# Altium PCB EPRTwinkie.PcbDoc
Units mm, origin at the board's own origin, x right, y up, seen from the top; angles counter-clockwise.
Board outline 28.5 x 27 mm, 4 copper layers (Component Side, Signal Layer 1, Signal Layer 2, Bottom Layer), stack 1.57 mm thick; 53 components, 71 nets, 267 pads, 188 vias.
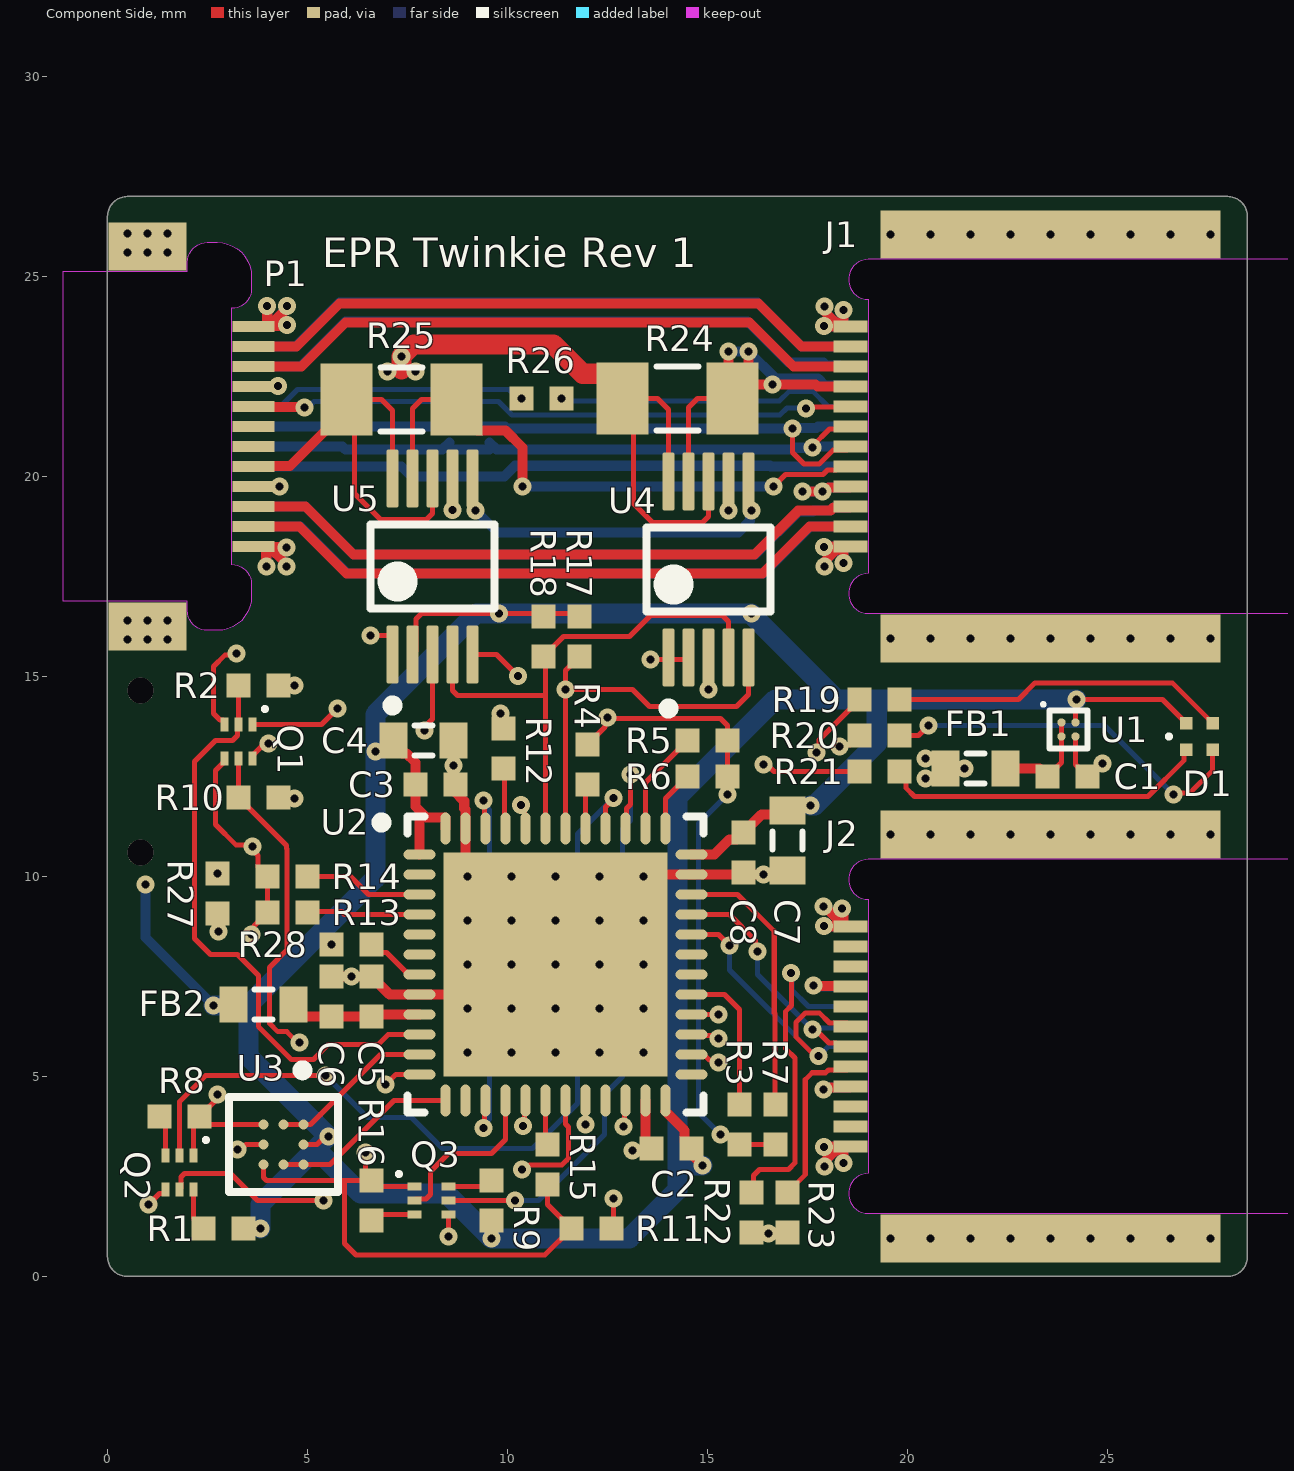
[diagram p0: Component Side view]
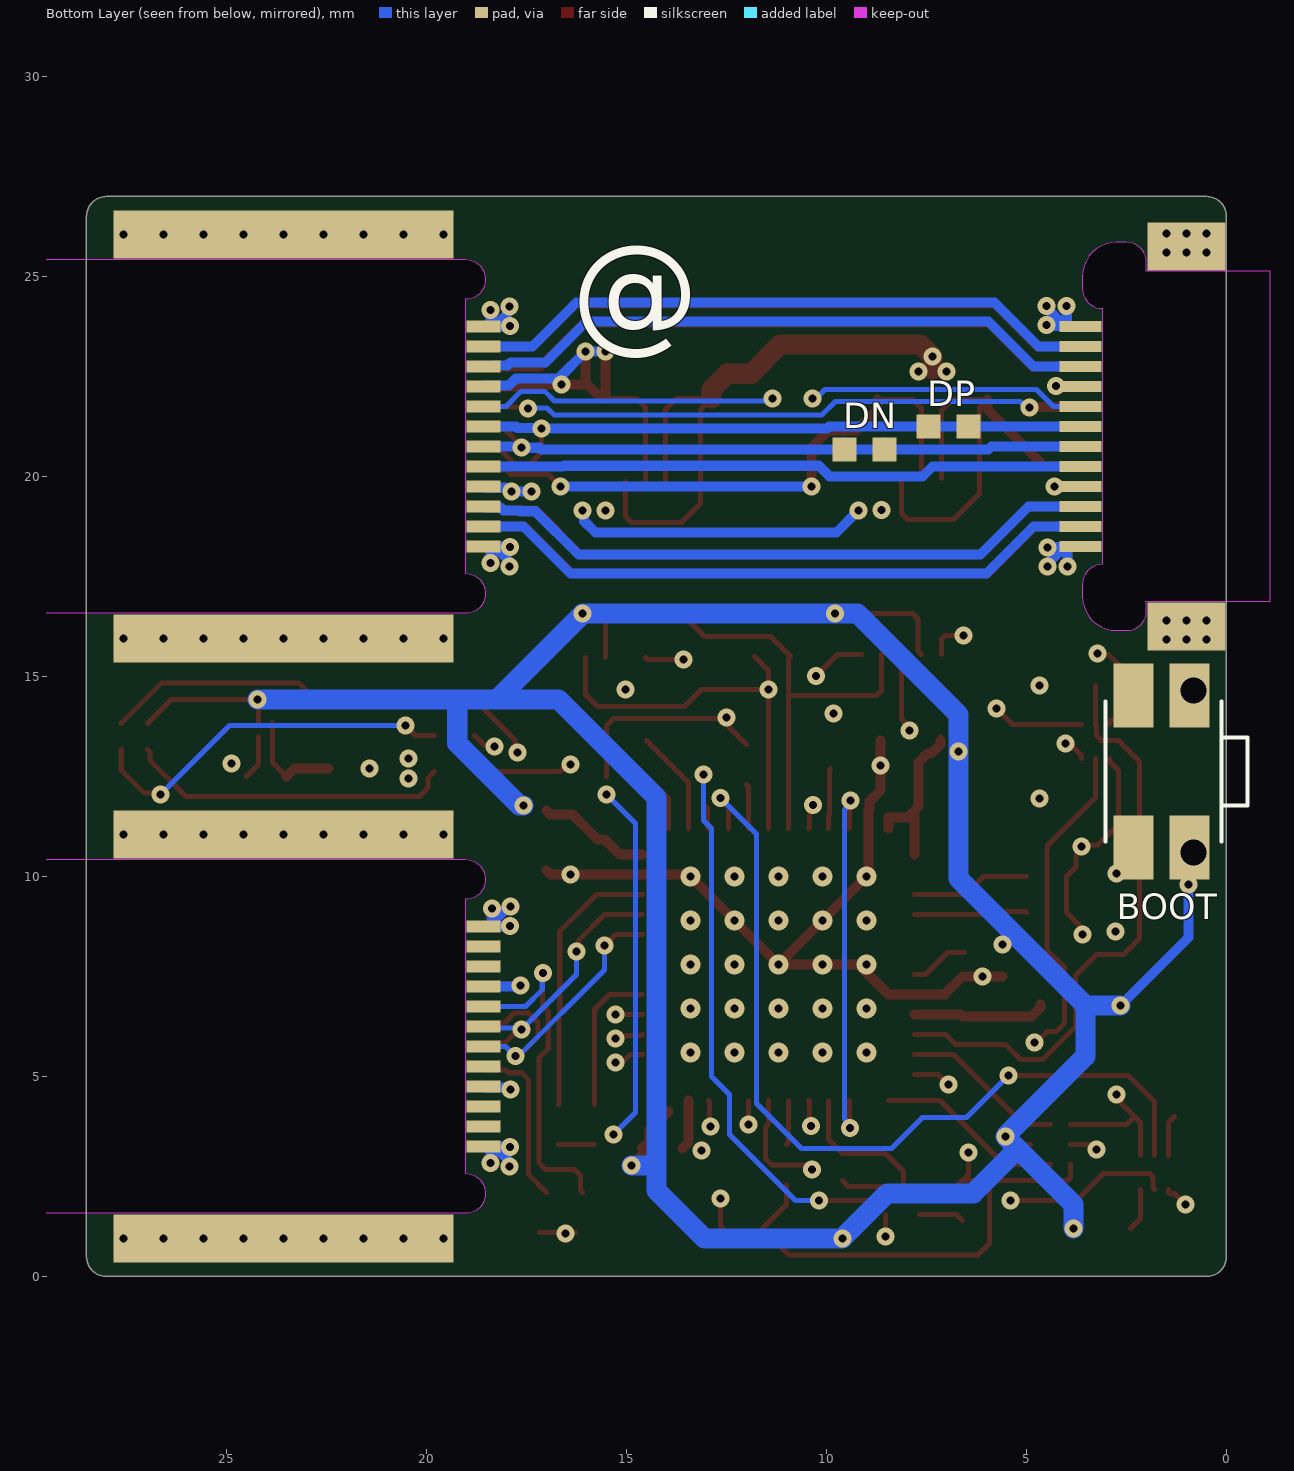
[diagram p1: Bottom Layer view, seen from below]
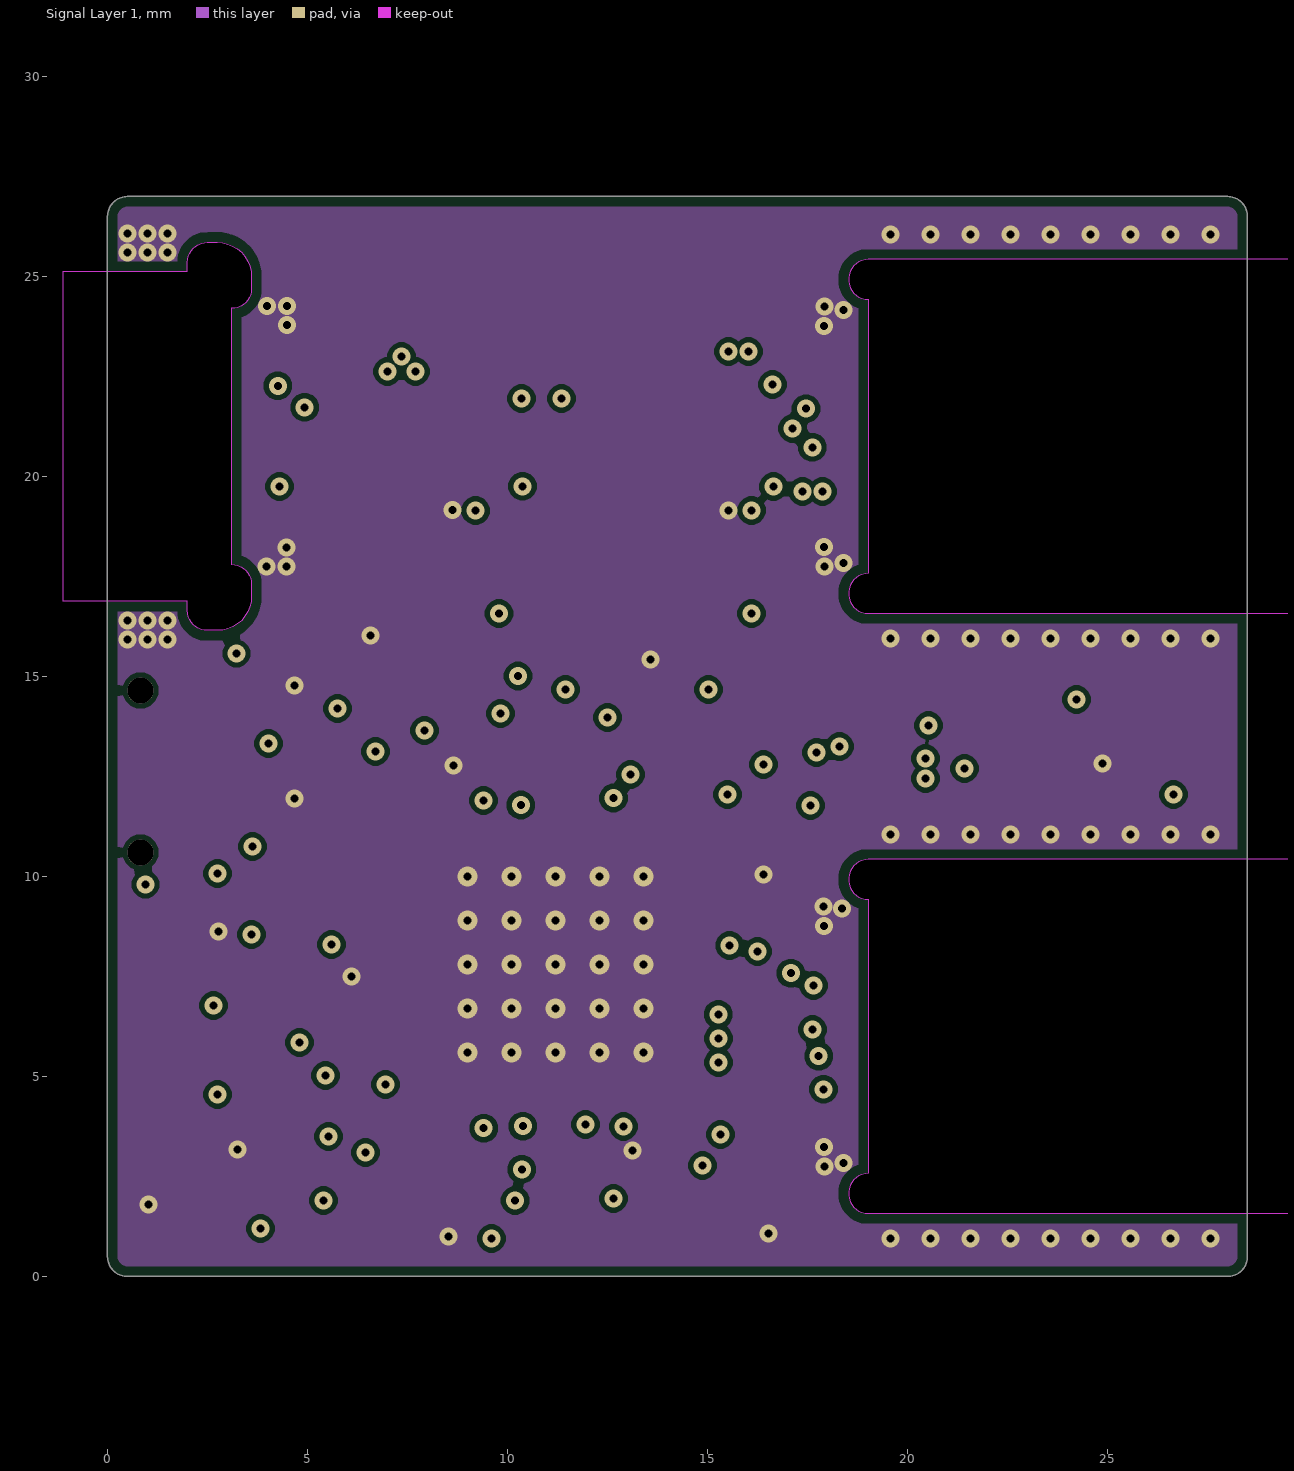
[diagram p2: Signal Layer 1]
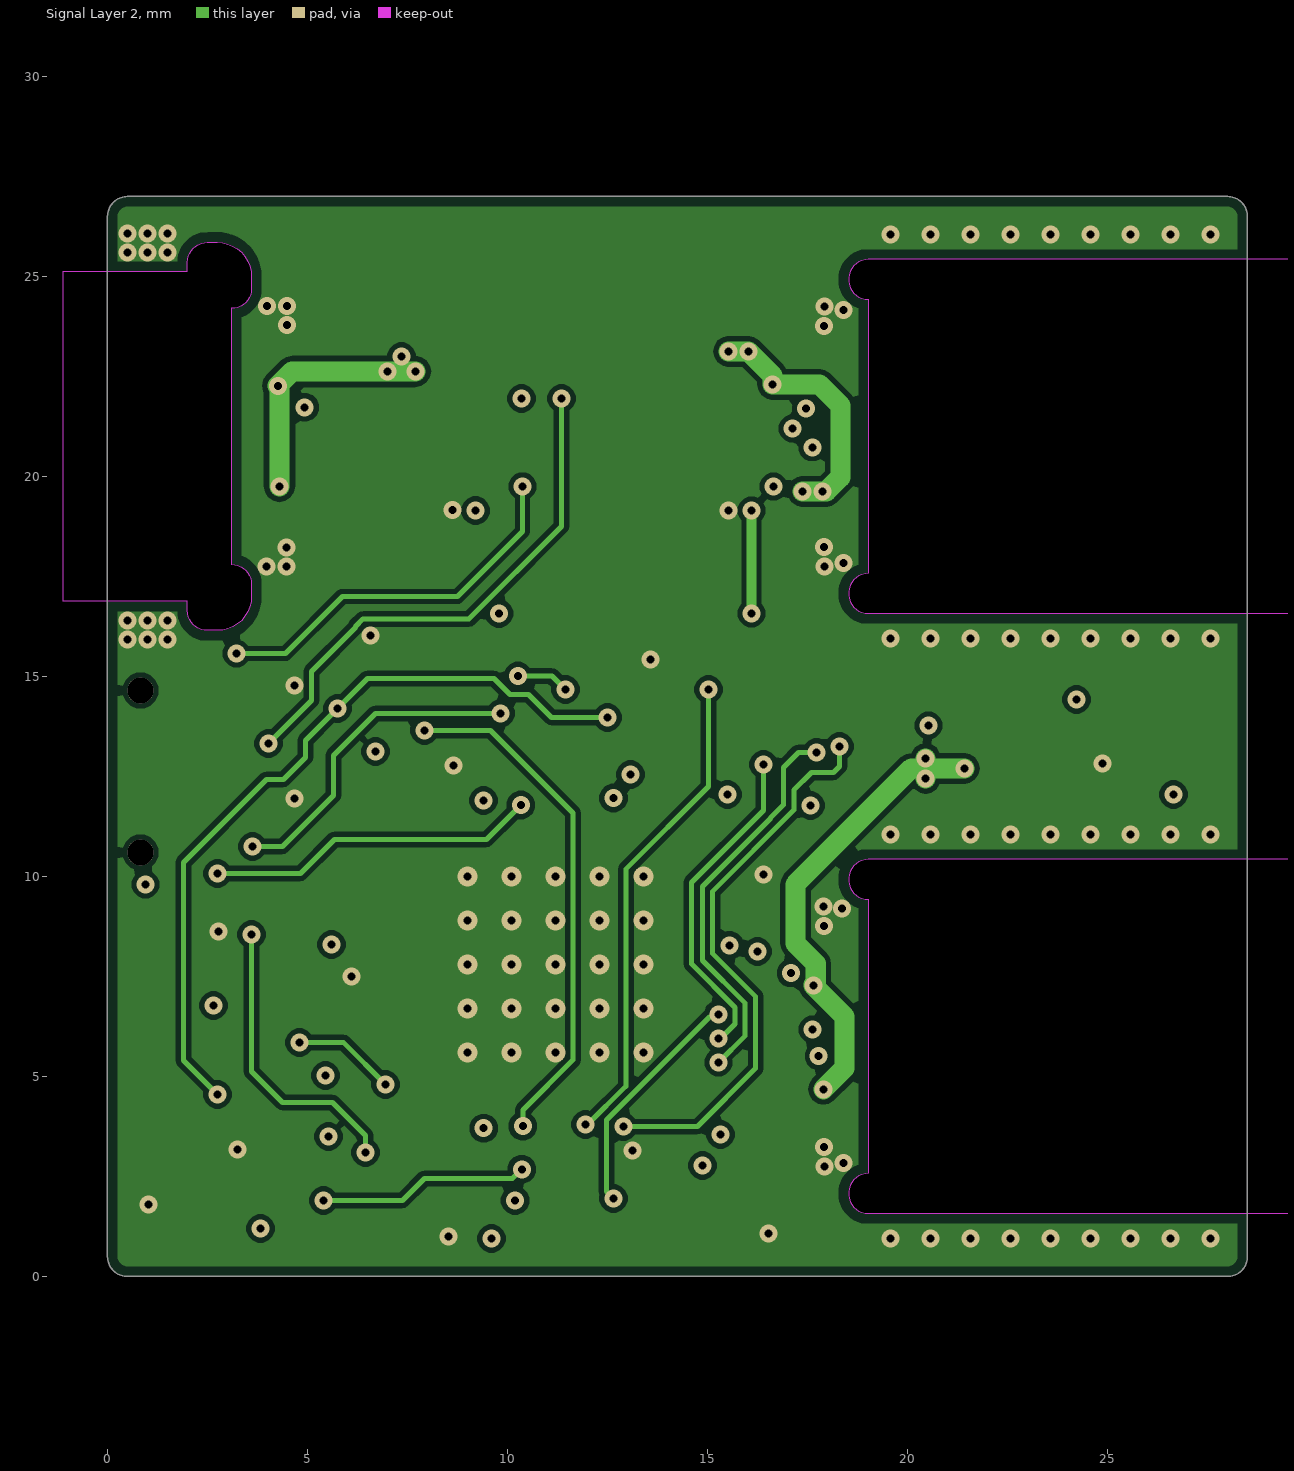
[diagram p3: Signal Layer 2]

## Layer stack, top to bottom
Top Solder: solder mask 0.0102, Solder Resist, Dk 3.8
Component Side: signal copper 0.035
Dielectric 1: prepreg 0.2, FR-4, Dk 4.6
Signal Layer 1: signal copper 0.0175
Dielectric 3: core 1.065, Dk 4.6
Signal Layer 2: signal copper 0.0175
Dielectric 2: prepreg 0.2, Dk 4.6
Bottom Layer: signal copper 0.035
Solder Side: solder mask 0.0102, Solder Resist, Dk 3.8

## Board outline
0,0.5 0,26.5 cw(c0.5,26.5) 0.5,27 28,27 cw(c28,26.5) 28.5,26.5 28.5,0.5 cw(c28,0.5) 28,0 0.5,0 cw(c0.5,0.5)

## Design rules (kind name [scope] priority, off if disabled: settings)
AssemblyTestPointUsage [All] p1: allowmultiple=TRUE
BoardOutlineClearance [All] p1: gap=0.254 ignorepadtopadclearanceinfootprint=FALSE except(0: Arc-SplitContinuation Track-SplitContinuation SMDPad-SplitContinuation THPad-SplitContinuation Via-SplitContinuation Fill-SplitContinuation Poly-SplitContinuation Region-SplitContinuation Text-SplitContinuation)
Clearance [All] p1: gap=0.127 ignorepadtopadclearanceinfootprint=FALSE
ComponentClearance [All] p1: gap=0.2 collisioncheckmode=3 verticalgap=0.254 showdistances=FALSE
FabricationTestPointUsage [All] p1: valid=0 allowmultiple=TRUE
HoleSize [All] p1: absolutevalues=TRUE maxlimit=3.1 minlimit=0.025 maxpercent=80.000 minpercent=20.000
MinimumSolderMaskSliver [All] p1: minsoldermaskwidth=0.076
PasteMaskExpansion [All] p1: expansion=-0.025
PlaneClearance [All] p1: clearance=0.254
PolygonConnect PolygonConnect_1 [HasFootprint('NETTIE_GND_LARGE')] p1: connectstyle=Direct reliefconductorwidth=0.254 reliefentries=4 polygonreliefangle="90 Angle" airgapwidth=0.254
PolygonConnect PolygonConnect_2 [InComponent('R50') or          InComponent('R58') or InComponent('R75')] p2: connectstyle=Direct reliefconductorwidth=0.254 reliefentries=4 polygonreliefangle="90 Angle" airgapwidth=0.254
PolygonConnect [All] p3: thpad.connectstyle=Relief thpad.reliefconductorwidth=0.254 thpad.reliefentries=4 thpad.polygonreliefangle="90 Angle" thpad.airgapwidth=0.254 smdpad.connectstyle=Relief smdpad.reliefconductorwidth=0.254 smdpad.reliefentries=4 smdpad.polygonreliefangle="90 Angle" smdpad.airgapwidth=0.254 via.connectstyle=Direct via.reliefconductorwidth=0.254 via.reliefentries=4 via.polygonreliefangle="90 Angle" via.airgapwidth=0.254
RoutingVias [All] p1: holewidth=0.711 width=1.27 viastyle="Through Hole" minholewidth=0.2 minwidth=0.45 maxholewidth=0.711 maxwidth=1.27
SilkToSilkClearance [All] p1: silktosilkclearance=0.025
SilkToSolderMaskClearance [IsPad] p1: minsilkscreentomaskgap=0.025 clearancetoexposedcopper=TRUE
SolderMaskExpansion [All] p1: expansion=0.019 istentingtop=FALSE
Width Width_BGA [WithinRoom('BGARoom')] p1: maxlimit=0.254 minlimit=0.09 preferedwidth=0.127
Width [All] p2: maxlimit=4 minlimit=0.127 preferedwidth=0.254 minimp=50.000000 maximp=50.000000 favimp=50.000000
21 further rules are at their usual default settings.

## Components (designator, comment, footprint, x,y, rotation, side; value= is the part's Value field where it differs from the comment)
BOOT "434331013822" 434331013822 1.575,12.625 r90 bottom
C1 "1005" CAPC1005 24,12.5 r180 top value=1u
C2 "1005" CAPC1005 14.1,3.2 r0 top value=100n
C3 "1005" CAPC1005 8.2,12.3 r180 top value=100n
C4 "1608" CAPC1608 7.9,13.4 r180 top value=4u7
C5 "1005" CAPC1005 6.6,7 r270 top value=10n
C6 "1005" CAPC1005 5.6,7 r270 top value=1u
C7 "1608" CAPC1608 17,10.9 r90 top value=4u7
C8 "1005" CAPC1005 15.9,10.6 r90 top value=100n
D1 "UHD111A" "Cree UHD111A" 27.3,13.5 r90 top
DN "1005" DogBone1005 9.05,20.675 r180 bottom net-tie
DP "1005" DogBone1005 6.95,21.25 r180 bottom net-tie
FB1 "1608" RESC1608 21.7,12.7 r180 top value=600R
FB2 "1608" RESC1608 3.9,6.8 r180 top value=600R
J1 "USB4070-30-C_REVC5" GCT_USB4070-30-C_STRADDLE 18.825,21 r270 top
J2 "USB4070-30-C_REVC5" GCT_USB4070-30-C_STRADDLE 18.825,6 r270 top
P1 "USB4151-GF-C_REVA" GCT_USB4151-GF-C_STRADDLE 3.4,21 r90 top
Q1 "PMDXB600UNE" SON35P100X40-6N 3.275,13.375 r270 top
Q2 "PMDXB600UNE" SON35P100X40-6N 1.8,2.6 r270 top
Q3 "PMDXB600UNE" SON35P100X40-6N 8.1,1.9 r0 top
R1 "1005" RESC1005 2.9,1.2 r180 top value=200R
R2 "1005" RESC1005 3.775,14.775 r0 top value=381k
R3 "1005" RESC1005 15.8,3.8 r270 top value=1k
R4 "1005" RESC1005 12,12.8 r90 top value=5k11
R5 "1005" RESC1005 15,13.4 r180 top value=4k75
R6 "1005" RESC1005 15,12.5 r180 top value=12k1
R7 "1005" RESC1005 16.7,3.8 r90 top value=35k7
R8 "1005" RESC1005 1.8,4 r180 top value=100R
R9 "1005" RESC1005 9.6,1.9 r90 top value=200R
R10 "1005" RESC1005 3.775,11.975 r0 top value=381k
R11 "1005" RESC1005 12.1,1.2 r180 top value=1k
R12 "1005" RESC1005 9.9,13.2 r90 top value=5k11
R13 "1005" RESC1005 4.5,9.1 r0 top value=4k75
R14 "1005" RESC1005 4.5,10 r0 top value=12k1
R15 "1005" RESC1005 11,2.8 r90 top value=35k7
R16 "1005" RESC1005 6.6,1.9 r270 top value=100R
R17 "1005" RESC1005 11.8,16 r270 top value=2k2
R18 "1005" RESC1005 10.9,16 r90 top value=2k2
R19 "1005" RESC1005 19.3,14.425 r180 top value=806R
R20 "1005" RESC1005 19.3,13.525 r180 top value=604R
R21 "1005" RESC1005 19.3,12.625 r180 top value=576R
R22 "1005" RESC1005 16.1,1.6 r270 top value=5k11
R23 "1005" RESC1005 17,1.6 r270 top value=5k11
R24 "3216" RESC3216 14.25,21.95 r0 top value=30m
R25 "3216" RESC3216 7.35,21.925 r0 top value=30m
R26 "1005" RESC1005 10.85,21.95 r0 top value=0R
R27 "1005" RESC1005 2.75,9.575 r270 top value=100k
R28 "1005" RESC1005 6.1,8.3 r0 top value=NM
U1 "NCP167BFCT330T2G" BGA4C35P2X2_64X64X33 24.025,13.675 r0 top
U2 "STM32F072CBU6" STM-UFQFPN48_L 11.2,7.8 r0 top
U3 "AD8606ACBZ-REEL7" FP-CB-8-1-MFG 4.4,3.3 r270 top
U4 "INA237AIDGSR" FP-DGS0010A-MFG 15.025,17.675 r90 top
U5 "INA237AIDGSR" FP-DGS0010A-MFG 8.125,17.75 r90 top

## Footprints (in the part's own frame and the unit in brackets; to place one, negate y for a bottom-side part, rotate by r counter-clockwise, add the part's x,y. Pads: shape width x height; smd on the part's side, far side on the other; paste and mask are expansions set on the pad)
434331013822 [mm] "WS-TASU 3.5x2.9 mm SMD side push"
  rect 1.6x1 smd: A1(-1.9,0.75) A2(1.9,0.75) B1(-1.9,-0.65) B2(1.9,-0.65)
  round 0.65 hole 0.65: B1(-2.025,-0.75) B2(2.025,-0.75)
  silkscreen extent -1.75,-2.1 1.75,1.45, body extent -2.35,-2.1 2.35,1.45, height 1.35
BGA4C35P2X2_64X64X33 [mm]
  round 0.208 smd: A1(-0.175,0.175) A2(0.175,0.175) B1(-0.175,-0.175) B2(0.175,-0.175)
  silkscreen extent -0.64,-0.48 0.48,0.64, body extent -0.32,-0.32 0.32,0.32, height 0.33
CAPC1005 [mm] "Chip Capacitor, 2-Leads, Body 1,00x0,50mm, IPC Medium Density"
  rect 0.6x0.6 smd: 1(-0.5,0) 2(0.5,0)
  body extent -0.53,-0.28 0.53,0.28, height 0.55
CAPC1608 [mm] "Chip Capacitor, 2-Leads, Body 1,60x0,80mm, IPC Medium Density"
  rect 0.7x0.9 smd: 1(-0.75,0) 2(0.75,0)
  silkscreen extent -0.23,-0.38 0.23,0.38, body extent -0.85,-0.45 0.85,0.45, height 0.9
"Cree UHD111A" [mm] "UHD111A, 4-Leads, Body 1,00x1,00mm, Pitch 0,66mm, IPC Medium Density"
  rect 0.32x0.32 smd: 1(-0.33,0.33) 2(-0.33,-0.33) 3(0.33,-0.33) 4(0.33,0.33)
  silkscreen extent -0.05,0.71 0.05,0.81, body extent -0.5,-0.5 0.5,0.5, height 0.61
DogBone1005 [mm]
  rect 0.6x0.6 smd paste-9: 1(0.5,0) 2(-0.5,0)
  Component Side lines w0.254: 0.5,0 -0.5,0
FP-CB-8-1-MFG [mm]
  round 0.25 smd paste+0 mask+0: A1(-0.5,0.5) A2(0,0.5) A3(0.5,0.5) B1(-0.5,0) B3(0.5,0) C1(-0.5,-0.5) C2(0,-0.5) C3(0.5,-0.5)
  silkscreen extent -1.98,-1.36 1.19,1.36, body extent -1.24,-1.41 1.24,1.41, height 0.25
FP-DGS0010A-MFG [mm]
  rrect33% 1.45x0.3 smd paste+0 mask+0: 1(-2.2,1) 2(-2.2,0.5) 3(-2.2,0) 4(-2.2,-0.5) 5(-2.2,-1) 6(2.2,-1) 7(2.2,-0.5) 8(2.2,0) 9(2.2,0.5) 10(2.2,1)
  silkscreen extent -3.6,-1.55 1.05,1.55, body extent -2.45,-1.5 2.45,1.5, height 1.1
GCT_USB4070-30-C_STRADDLE [mm]
  rect 0.3x0.85 smd far side paste-10: A1(-2.75,-0.25) A2(-2.25,-0.25) A3(-1.75,-0.25) A4(-1.25,-0.25) A5(-0.75,-0.25) A6(-0.25,-0.25) A7(0.25,-0.25) A8(0.75,-0.25) A9(1.25,-0.25) A10(1.75,-0.25) A11(2.25,-0.25) A12(2.75,-0.25)
  rect 0.3x0.85 smd paste-10: B1(2.75,-0.25) B2(2.25,-0.25) B3(1.75,-0.25) B4(1.25,-0.25) B5(0.75,-0.25) B6(0.25,-0.25) B7(-0.25,-0.25) B8(-0.75,-0.25) B9(-1.25,-0.25) B10(-1.75,-0.25) B11(-2.25,-0.25) B12(-2.75,-0.25)
  rect 1.2x8.5 / inner rect 0x0 / far side rect 1.2x8.5 all layers, no hole paste-10: S1(-5.05,4.75) S2(5.05,4.75)
  Keep-Out Layer board cut-out: -4.425,0.2 -4.375,-0.017 -4.237,-0.191 -4.036,-0.287 -3.814,-0.287 -3.613,-0.191 -3.475,-0.017 -3.425,0.2 -3.425,0.2 3.425,0.2 3.475,-0.017 3.613,-0.191 3.814,-0.287 4.036,-0.287 4.237,-0.191 4.375,-0.017 4.425,0.2 4.425,0.2 4.425,10.8 -4.425,10.8
  body extent -4.42,-1.3 4.42,10.8, height 1.48
GCT_USB4151-GF-C_STRADDLE [mm]
  rect 0.28x1.05 smd far side paste-10: A1(2.75,-0.25) A2(2.25,-0.25) A3(1.75,-0.25) A4(1.25,-0.25) A5(0.75,-0.25) A6(0.25,-0.25) A7(-0.25,-0.25) A8(-0.75,-0.25) A9(-1.25,-0.25) A10(-1.75,-0.25) A11(-2.25,-0.25) A12(-2.75,-0.25)
  rect 0.28x1.05 smd paste-10: B1(-2.75,-0.25) B2(-2.25,-0.25) B3(-1.75,-0.25) B4(-1.25,-0.25) B5(-0.75,-0.25) B6(-0.25,-0.25) B7(0.25,-0.25) B8(0.75,-0.25) B9(1.25,-0.25) B10(1.75,-0.25) B11(2.25,-0.25) B12(2.75,-0.25)
  rect 1.2x1.95 / inner rect 0x0 / far side rect 1.2x1.95 all layers, no hole paste-10: S1(-4.75,2.4) S2(4.75,2.4)
  Keep-Out Layer board cut-out: -4,-0.2 -4.325,-0.135 -4.601,0.049 -4.785,0.325 -4.85,0.65 -4.85,0.65 -4.85,0.9 -4.812,1.091 -4.704,1.254 -4.541,1.362 -4.35,1.4 -4.35,1.4 -4.125,1.4 -4.125,4.5 4.125,4.5 4.125,1.4 4.35,1.4 4.541,1.362 4.704,1.254 4.812,1.091 4.85,0.9 4.85,0.9 4.85,0.65 4.785,0.325 4.601,0.049 4.325,-0.135 4,-0.2 4,-0.2 3.7,-0.2 3.509,-0.162 3.346,-0.054 3.238,0.109 3.2,0.3 3.2,0.3 -3.2,0.3 -3.238,0.109 -3.346,-0.054 -3.509,-0.162 -3.7,-0.2 -3.7,-0.2
  body extent -4.33,-1.25 4.33,11.1, height 2.08
RESC1005 [mm] "Chip Resistor, 2-Leads, Body 1,00x0,50mm, IPC High Density"
  rect 0.6x0.6 smd: 1(-0.5,0) 2(0.5,0)
  body extent -0.53,-0.28 0.53,0.28, height 0.37
RESC1608 [mm] "Chip Resistor, 2-Leads, Body 1,55x0,85mm, IPC Medium Density"
  rect 0.7x0.9 smd: 1(-0.75,0) 2(0.75,0)
  silkscreen extent -0.23,-0.38 0.23,0.38, body extent -0.8,-0.48 0.8,0.48, height 0.55
RESC3216 [mm] "Chip Resistor, 2-Leads, Body 3,15x1,60mm, IPC Medium Density"
  rect 1.3x1.8 smd: 1(-1.375,0) 2(1.375,0)
  silkscreen extent -0.53,-0.8 0.53,0.8, body extent -1.65,-0.87 1.65,0.87, height 0.65
SON35P100X40-6N [mm] "SON, 6-Leads, Body 1,10x1,00mm, Pitch 0,35mm, IPC Medium Density"
  rect 0.35x0.2 smd: 1(-0.425,0.35) 2(-0.425,0) 3(-0.425,-0.35) 4(0.425,-0.35) 5(0.425,0) 6(0.425,0.35)
  silkscreen extent -0.86,0.61 -0.76,0.71, body extent -0.49,-0.55 0.51,0.55, height 0.39
STM-UFQFPN48_L [mm] "QFN, 48-Leads, Body 7.1x7.1mm, Pitch 0.5mm, Thermal Pad 5.6x5.6mm, IPC High Density"
  oval 0.8x0.25 smd: 1(-3.4,2.75) 2(-3.4,2.25) 3(-3.4,1.75) 4(-3.4,1.25) 5(-3.4,0.75) 6(-3.4,0.25) 7(-3.4,-0.25) 8(-3.4,-0.75) 9(-3.4,-1.25) 10(-3.4,-1.75) 11(-3.4,-2.25) 12(-3.4,-2.75) 25(3.4,-2.75) 26(3.4,-2.25) 27(3.4,-1.75) 28(3.4,-1.25) 29(3.4,-0.75) 30(3.4,-0.25) 31(3.4,0.25) 32(3.4,0.75) 33(3.4,1.25) 34(3.4,1.75) 35(3.4,2.25) 36(3.4,2.75)
  oval 0.25x0.8 smd: 13(-2.75,-3.4) 14(-2.25,-3.4) 15(-1.75,-3.4) 16(-1.25,-3.4) 17(-0.75,-3.4) 18(-0.25,-3.4) 19(0.25,-3.4) 20(0.75,-3.4) 21(1.25,-3.4) 22(1.75,-3.4) 23(2.25,-3.4) 24(2.75,-3.4) 37(2.75,3.4) 38(2.25,3.4) 39(1.75,3.4) 40(1.25,3.4) 41(0.75,3.4) 42(0.25,3.4) 43(-0.25,3.4) 44(-0.75,3.4) 45(-1.25,3.4) 46(-1.75,3.4) 47(-2.25,3.4) 48(-2.75,3.4)
  rect 5.6x5.6 smd: 49(0,0)
  silkscreen extent -4.47,-3.7 3.7,3.7, body extent -3.55,-3.55 3.55,3.55, height 0.6

## Part data
BOOT: "WS-TASU SMT Tact Switch 3.5x2.9mm side push, SPST-NO, 12VDC, 50mA, 220g", Manufacturer="Wurth Elektronik", Operating Temperature Max=85°C, Operating Temperature Min=-40°C, Rated Current=50mA, Rated Voltage=12VDC, Category="Tact Switches", Circuit=SPST-NO, ComponentLink1Description="Website Link", ComponentLink1URL=https://www.we-online.com/redexpert/article/434331013822?ad, ComponentLink2Description="Datasheet Link", ComponentLink2URL=https://www.we-online.com/redexpert/spec/434331013822?ad, Contact Material="Stainless Steel", Contact Plating=Silver, Height=1.35mm, Length=3.5mm, Manufacturer Part Number=434331013822, Match Code=WS-TASU, Mount="Surface Mount", Operation Force=220g, Packaging="Tape and Reel", Terminal Material="Copper Alloy", Terminal Plating=Silver, Washable=No, Width=2.9mm
C1 C2 C3 C4 C5 C6 C7 C8: library part Cap, "Capacitor", LatestRevisionDate=17-Jul-2002, LatestRevisionNote="Re-released for DXP Platform.", PackageDescription="Radial Cap, Thru-Hole; 2 Leads; 0.3 in Pin Spacing", PackageReference=RAD-0.3, Published=8-Jun-2000, Publisher="Altium Limited"
D1: library part UHD111A_LED, "LED RGB SMD"
DN DP: library part DogBone1005
FB1 FB2 R1 R2 R3 R4 R5 R6 R7 R8 R9 R10 R11 R12 R13 R14 R15 R16 R17 R18 R19 R20 R21 R22 R23 R24 R25 R26 R27 R28: library part Res2, "Resistor", LatestRevisionDate=17-Jul-2002, LatestRevisionNote="Re-released for DXP Platform.", PackageDescription="Axial Device, Thru-Hole; 2 Leads; 0.4 in Pin Spacing", PackageReference=AXIAL-0.4, Published=8-Jun-2000, Publisher="Altium Limited"
J1 J2: "USB-C (USB TYPE-C) USB 3.2 Gen 2 (USB 3.1 Gen 2, Superspeed + (USB 3.1)) Receptacle Connector 24 Position Surface Mount, Through Hole", Package=None, Check_prices=https://www.snapeda.com/parts/USB4070-30-C/Global+Connector+Technology/view-part/?ref=eda, Digi-Key_Part_Number=2073-USB4070-30-CTR-ND, MF="Global Connector Technology", MP=USB4070-30-C, Purchase-URL=https://pricing.snapeda.com/search/part/USB4070-30-C/?ref=eda, SnapEDA_Link=https://www.snapeda.com/parts/USB4070-30-C/Global+Connector+Technology/view-part/?ref=snap
P1: "USB Type C Plug, Vertical, SMT", Package=None, Availability=Unavailable, MP=USB4151-GF-C_REVA, Price=None
Q1 Q2 Q3: "Dual N Channel Field Effect Transistor"
U1: "ON SEMICONDUCTOR - NCP167BFCT330T2G - LDO, FIXED, 3.3V, 0.7A, -40 TO 125DEG C", Manufacturer_Name=onsemi, Mouser Part Number=863-NCP167BFCT330T2G, Arrow Part Number=NCP167BFCT330T2G, Arrow Price/Stock=https://www.arrow.com/en/products/ncp167bfct330t2g/on-semiconductor?region=nac, Datasheet Link=https://www.onsemi.com/pub/Collateral/NCP167-D.PDF, Geometry.Height=0.33mm, Manufacturer_Part_Number=NCP167BFCT330T2G, Mouser Price/Stock=https://www.mouser.co.uk/ProductDetail/onsemi/NCP167BFCT330T2G?qs=l7cgNqFNU1gQH4CpPGF7lw%3D%3D
U2: library part CMP-0304-00173-4, "ARM Cortex-M0 32-bit MCU, 128 KB Flash, 16 KB Internal RAM, 37 I/Os, 48-Pin UFQFPN, -40 to 85 degC, Tray", I/Os (High Current)=37, Manufacturer=STMicroelectronics, Operating Frequency(F) (Processor speed) (MHz)=48, Package Description="48-Pin Ultra Thin Fine Pitch Quad Flat No-Lead, 7 x 7 x 0.6 mm Body, 0.5 mm Pitch, Exposed Pad", Package Reference=UFQFPN48, Supply Voltage(Vcc) min (V)=2, ComponentLink1Description="Manufacturer URL", ComponentLink1URL=http://www.st.com/, ComponentLink2Description=Datasheet, ComponentLink2URL=http://www.st.com/st-web-ui/static/active/en/resource/technical/document/datasheet/DM00090510.pdf, Core="ARM Cortex-M0", D/A Converter=1, DatasheetVersion="Rev. 5", FLASH Size (Prog) (kB)=128, Internal RAM Size (kB)=16, Mounting Technology="Surface Mount", Packing=Tray, PartNumber=STM32F072CBU6
U3: library part CMP-0384-00013-3, "IC OPAMP GP 2 CIRCUIT 8WLCSP", Case/Package=BGA, Input Bias Current=1pA, Input Capacitance=8.8pF, Input Offset Voltage (Vos)=300uV, Input Voltage Noise Density="8nV/sqrt Hz", Max Frequency=1MHz, Max Operating Temperature=125°C, Max Supply Voltage=5.5V, Min Operating Temperature=-40°C, Min Supply Voltage=2.7V, Operating Supply Current=2.4mA, Output Current per Channel=80mA, Package Quantity=3000, Power Supply Rejection Ratio (PSRR)=95dB, Quiescent Current=1.2mA, Voltage Gain=120dB, Amplifier Type="GENERAL PURPOSE", Bandwidth=10MHz, Common Mode Rejection Ratio=85dB, Contact Plating=Copper, Gain Bandwidth Product=10MHz, Height=0.38mm, Lead Free="Contains Lead", Length=1.48mm, Number of Amplifiers=2, Number of Channels=2, Number of Circuits=2, Number of Elements=2, Number of Pins=8, Packaging="Tape and Reel", REACH SVHC="No SVHC", RoHS Compliant=Yes, Series=DigiTrim®, Settling Time=1us, Slew Rate=5V/µs, Technology=CMOS, Unity Gain Bandwidth Product=10MHz, Width=1.825mm
U4 U5: library part CMP-04895-000433-1, "85-V, 16-BIT, I2C OUTPUT CURRENT"

## Via types
v1: diameter 0.45, hole 0.2, Component Side to Bottom Layer, tented both sides, 163 vias
v2: diameter 0.5, hole 0.2, Component Side to Bottom Layer, 25 vias

## Nets (pads, with @x,y where several pads share a name; then routed paths per layer and width w, separated by ;. In a path a pad name is that pad's centre, name@x,y a point inside that pad or via, vN(x,y) a via of type N, cw(c..) or ccw(c..) an arc to the next point about the centre after c; other vN are vias at no path point)
3V3: BOOT.B1 C2.2 C3.2 C4.2 C7.2 C8.2 D1.4 FB2.2 R1.1 R9.1 R17.1 R18.2 R28.1 U1.A2 U2.1 U2.24 U2.36 U2.48 U3.A2 U4.6 U5.2 U5.6 | length 97.4
  Component Side w0.127: U3.A2 5.238,3.3 5.438,3.5 v1(5.525,3.5) ; C4.2 C4.2@7.15,13.5 ; U5.2 7.712,15.636 7.712,16.437 7.85,16.575 v1(9.787,16.575) 11.725,16.575 R17.1 ; U1.A2 24.2,14.4 v1(24.225,14.425) 26.375,14.425 D1.4@26.975,13.825
  Component Side w0.254: C4.2 7.15,13.3 7.373,13.077 7.473,13.077 7.7,12.85 C3.2 7.7,11.75 7.838,11.612 ; U2.1 7.8,11.573 7.838,11.612 ; U2.48 8.45,11.471 8.448,11.473 7.977,11.473 7.838,11.612 ; U2.24@13.952,4.127 14.427,3.652 14.427,3.373 14.589,3.211 C2.2@14.611,3.211 ; C2.2@14.525,3.125 v1(14.875,2.775) ; U2.36 14.602,10.552 15.174,10.552 15.549,10.927 15.727,10.927 C8.2 16.347,11.547 16.897,11.547 C7.2
  Signal Layer 2 w0.254: v1(16.1,16.575) v1(16.1,16.575) v1(16.102,19.149) v1(16.102,19.149)
  Bottom Layer w0.254: v1(0.95,9.8) 0.95,8.475 v1(2.65,6.775) ; v1(5.525,3.5) v1@5.548,3.523 ; v1(9.202,19.149) 9.75,18.6 15.775,18.6 16.064,18.889 16.064,19.112 v1(16.102,19.149)
  Bottom Layer w0.508: v1(2.65,6.775) 3.525,6.775 ; v1(3.825,1.2) 3.825,1.8 5.213,3.188 ; v1(14.875,2.775) 14.275,2.775 14.25,2.8 ; v1@16.073,16.548 v1(16.1,16.575) ; v1(17.575,11.775) 17.682,11.775 19.235,13.327 19.235,14.39 19.2,14.425 ; v1(24.225,14.425) 19.2,14.425 ; 3.525,6.775 3.525,5.5 v1(5.525,3.5) 5.213,3.188 ; 3.525,6.775 6.7,9.95 v1(6.7,13.125) 6.7,14.05 9.225,16.575 v1(9.787,16.575) v1(16.1,16.575) ; 5.213,3.188 6.325,2.075 8.475,2.075 v1(9.6,0.95) 13.05,0.95 14.25,2.15 14.25,2.8 ; 14.25,2.8 14.25,11.975 16.7,14.425 18.225,14.425 ; v1(16.1,16.575) 16.1,16.55 17.163,15.488 18.225,14.425 ; 18.225,14.425 19.2,14.425
  other v1: 5.6,8.3
BOOT: BOOT.A1 R27.1 U2.44 | length 8.9
  Component Side w0.127: v1(10.336,11.786) 10.336,11.699 10.426,11.608 10.426,11.224 U2.44
  Signal Layer 2 w0.127: v1(2.75,10.075) 4.825,10.075 5.675,10.925 9.475,10.925 v1(10.336,11.786)
CC1_BUF: U2.11 U3.A1 U3.B1 | length 4.1
  Component Side w0.127: U3.B1 U3.A1 5.075,3.8 6.825,5.55 U2.11
CC1_EN: Q1.2 R2.1 U2.10 | length 14.9
  Component Side w0.127: R2.1 Q1.2 3.25,13.775 3.25,13.525 3.125,13.4 2.7,13.4 2.175,12.875 2.175,8.45 2.575,8.05 3.25,8.05 3.775,7.525 3.775,6.246 4.596,5.425 5.149,5.425 5.528,5.804 6.773,5.804 7.019,6.05 U2.10
CC1_RA: R3.1 U2.29 | length 3.7
  Component Side w0.127: U2.29 15.425,7.05 15.8,6.675 R3.1
CC1_RD: R4.1 U2.41 | length 1.1
  Component Side w0.127: U2.41 11.95,12.25 R4.1
CC1_RP1A5: R6.2 U2.37 | length 1.5
  Component Side w0.127: U2.37 13.95,11.95 R6.2
CC1_RP3A0: R5.2 U2.38 | length 2.6
  Component Side w0.127: U2.38 13.45,12.35 R5.2
CC1_RPUSB: R7.2 U2.34 | length 6.8
  Component Side w0.127: U2.34 15.75,9.55 16.668,8.632 16.668,6.592 16.684,6.576 16.684,4.316 R7.2
CC1_TX_DATA: Q2.2 U2.40 | length 21.6
  Component Side w0.127: Q2.2 1.8,4.369 2.456,5.025 v1(5.45,5.025) ; U2.40 12.45,11.738 12.65,11.937 v1(12.65,11.961)
  Bottom Layer w0.127: v1(5.45,5.025) 6.5,3.975 7.6,3.975 8.375,3.2 10.625,3.2 11.75,4.325 11.75,11.061 v1(12.65,11.961)
CC1_TX_EN: Q2.5 U2.19 | length 12.2
  Component Side w0.127: Q2.5 1.836,2.211 1.836,2.486 1.925,2.575 3.075,2.575 3.75,1.9 v1(5.4,1.9) ; v1(10.357,2.679) 10.444,2.679 10.556,2.79 11.36,2.79 11.397,2.828 11.403,2.828 11.525,2.95 11.525,3.734 11.45,3.809 U2.19
  Signal Layer 2 w0.127: v1(5.4,1.9) 7.375,1.9 7.925,2.45 10.121,2.45 10.35,2.679 v1(10.357,2.679)
CC2_ALERT_n: U2.17 U5.3 | length 15.6
  Component Side w0.127: v1(7.925,13.65) 7.925,13.737 8.125,13.937 U5.3 ; v1(10.385,3.757) 10.426,3.799 10.426,4.376 U2.17
  Signal Layer 2 w0.127: v1(7.925,13.65) 9.575,13.65 11.64,11.585 11.64,5.418 10.385,4.162 v1(10.385,3.757)
CC2_BUF: U2.13 U3.A3 U3.B3 | length 4.7
  Component Side w0.127: U3.B3 U3.A3 5.562,2.8 7.162,4.4 U2.13
CC2_EN: Q1.5 R10.1 U2.12 | length 11.8
  Component Side w0.127: Q1.5 R10.1 4.475,10.775 4.475,10.7 4.491,10.684 4.491,8.166 4.05,7.725 4.05,6.331 4.259,6.121 4.484,6.121 4.755,5.85 v1(4.8,5.85) ; v1(6.95,4.8) 6.959,4.8 7.209,5.05 U2.12
  Signal Layer 2 w0.127: v1@4.804,5.846 5.904,5.846 v1(6.95,4.8)
CC2_RA: R11.1 U2.28 | length 7.4
  Component Side w0.127: R11.1 12.65,1.25 v1(12.65,1.95) ; U2.28 v1(15.273,6.551)
  Signal Layer 2 w0.127: v1(12.65,1.95) 12.475,2.125 12.475,3.913 15.051,6.489 15.212,6.489 v1(15.273,6.551)
CC2_RD: R12.1 U2.45 | length 1.5
  Component Side w0.127: R12.1 9.92,12.68 9.92,11.538 9.95,11.508 U2.45
CC2_RP1A5: R14.2 U2.3 | length 3
  Component Side w0.127: R14.2 6.075,10 6.525,9.55 U2.3
CC2_RP3A0: R13.2 U2.4 | length 2.8
  Component Side w0.127: R13.2 5.025,9.125 5.85,9.125 5.925,9.05 U2.4
CC2_RPUSB: R15.2 U2.18 | length 1.1
  Component Side w0.127: U2.18 10.95,3.35 R15.2
CC2_TX_DATA: Q3.2 U2.16 | length 4.2
  Component Side w0.127: Q3.2 7.711,1.936 7.961,1.936 8.075,2.05 8.075,2.625 8.525,3.075 9.6,3.075 9.95,3.425 U2.16
CC2_TX_EN: Q3.5 U2.39 | length 15.3
  Component Side w0.127: Q3.5 v1(10.19,1.9) ; U2.39 12.974,11.224 12.974,11.697 13.075,11.799 v1(13.075,12.55)
  Bottom Layer w0.127: v1(10.19,1.9) 10.775,1.9 12.425,3.55 12.425,4.55 12.875,5 12.875,11.2 13.075,11.4 v1(13.075,12.55)
DAC: U2.14
GND: C1.1 C2.1 C3.1 C4.1 C5.1 C6.1 C7.1 C8.1 J1.A1 J1.A12 J1.B1 J1.B12 J1.S1 J1.S2 J2.A1 J2.A12 J2.B1 J2.B12 J2.S1 J2.S2 P1.A1 P1.A12 P1.B1 P1.B12 P1.S1 P1.S2 Q2.4 Q3.4 R2.2 R10.2 R22.2 R23.2 R27.2 U1.B2 U2.8 U2.23 U2.35 U2.47 U2.49 U3.C2 U4.1 U4.2 U4.7 U5.1 U5.7 | length 49.4
  Component Side w0.127: v1(1.025,1.8) 1.298,2.073 1.413,2.073 1.45,2.11 Q2.4 ; v1(3.25,3.175) 3.337,3.175 3.462,3.3 U3.C2 ; v1(6.575,16.025) 7.039,16.025 7.125,15.938 U5.1 ; v1(8.525,1) Q3.4 ; v1(13.575,15.425) 14.475,15.425 U4.2 ; R22.2@16.275,1.1 R23.2@17.175,1.1 ; U1.B2 24.2,12.8 C1.1
  Component Side w0.254: P1.B1 4.035,18.25 P1.B1@4.048,18.237 ; P1.B12 P1.B12@3.656,23.75 ; P1.B12@3.669,23.763 P1.B12@3.656,23.75 ; v1(3.975,17.75) 3.969,17.756 3.969,18.237 P1.B1@4.048,18.237 ; v1(3.994,24.263) P1.B12@3.994,23.763 ; v1(4.475,17.75) 4.437,17.788 4.437,17.848 P1.B1@4.048,18.237 ; v1(4.475,18.225) 4.463,18.237 P1.B1@4.048,18.237 ; v1(4.494,23.788) 4.469,23.763 P1.B12@4.048,23.763 ; v1(4.494,24.263) 4.456,24.225 4.456,24.171 P1.B12@4.048,23.763 ; C6.1 v1(6.1,7.5) C5.1 7.048,7.052 7.798,7.052 U2.8 7.802,7.052 8.46,7.052 9.208,7.8 v2(10.1,7.8) v2(11.2,7.8) ; C4.1 8.65,12.15 8.921,11.879 8.921,11.702 8.948,11.675 8.948,11.202 U2.47 8.95,10.05 v2(9,10) v2(10.1,8.9) v2(11.2,7.8) ; U2.23 13.452,4.398 13.452,3.348 C2.1 ; C7.1 16.902,10.052 14.602,10.052 U2.35 13.45,10.05 v2(12.3,8.9) v2(11.2,7.8) ; v1(17.9,9.25) 17.925,9.25 J2.B12@18.277,8.898 ; v1(17.914,3.236) 17.921,3.243 J2.B1@18.293,3.243 ; v1(17.914,8.764) 17.921,8.757 J2.B12@18.416,8.757 ; v1(17.914,18.236) 17.921,18.243 J1.B1@18.277,18.243 ; v1(17.914,23.764) 17.921,23.757 J1.B12@18.293,23.757 ; v1(17.925,2.75) 17.963,2.788 17.963,2.913 J2.B1@18.293,3.243 ; v1(17.925,17.75) 17.963,17.788 17.963,17.913 18.277,18.227 18.4,18.227 v1(18.4,17.835) ; v1(17.925,24.25) 17.963,24.212 17.963,24.087 J1.B12@18.293,23.757 ; v1(18.362,9.203) 18.4,9.165 18.4,8.773 J2.B12@18.416,8.757 ; v1(18.4,2.835) 18.4,3.227 J2.B1@18.416,3.243 ; v1(18.4,24.165) 18.4,23.773 J1.B12@18.416,23.757 ; J1.B12@18.536,23.757 J1.B12@18.416,23.757 ; J1.B12@18.543,23.75 J1.B12 ; J2.B1 18.423,3.25 J2.B1@18.416,3.243 ; J2.B12 18.568,8.757 J2.B12@18.416,8.757 ; P1.B12@3.656,23.75 P1.B12@3.981,23.75 ; P1.B12@3.981,23.75 4.035,23.75 P1.B12@4.048,23.763 ; P1.B12@3.981,23.75 P1.B12@3.994,23.763 ; P1.B12@3.994,23.763 P1.B12@4.048,23.763 ; J2.B1@18.293,3.243 J2.B1@18.416,3.243 ; J1.B12@18.293,23.757 J1.B12@18.416,23.757
  Bottom Layer w0.254: v1(3.975,17.75) P1.A12@3.975,18.237 ; v1(3.994,24.263) P1.A1@3.994,23.763 ; v1(4.475,17.75) 4.437,17.788 4.437,17.848 P1.A12@4.048,18.237 ; v1(4.475,18.225) 4.463,18.237 P1.A12@4.048,18.237 ; v1(4.494,23.788) 4.469,23.763 P1.A1@4.048,23.763 ; v1(4.494,24.263) 4.456,24.225 4.456,24.171 P1.A1@4.048,23.763 ; v1(17.9,9.25) 17.953,9.25 18.328,8.875 J2.A1@18.362,8.875 ; v1(17.914,3.236) 17.921,3.243 18.416,3.243 18.423,3.25 J2.A12 ; v1(17.914,8.764) 17.921,8.757 J2.A1@18.244,8.757 ; v1(17.914,18.236) 17.921,18.243 J1.A12@18.293,18.243 ; v1(17.914,23.764) 17.921,23.757 J1.A1@18.293,23.757 ; v1(17.925,2.75) 17.963,2.788 17.963,2.913 18.277,3.227 18.4,3.227 v1(18.4,2.835) ; v1(17.925,17.75) 17.963,17.788 17.963,17.913 J1.A12@18.293,18.243 ; v1(17.925,24.25) 17.963,24.212 17.963,24.087 J1.A1@18.293,23.757 ; v1(18.362,9.203) J2.A1@18.362,8.875 ; v1(18.4,17.835) 18.4,18.227 J1.A12@18.416,18.243 ; v1(18.4,24.165) 18.4,23.773 J1.A1@18.416,23.757 ; J2.A1 18.568,8.757 J2.A1@18.244,8.757 ; J1.A12 18.423,18.25 J1.A12@18.416,18.243 ; J1.A1 18.423,23.75 J1.A1@18.416,23.757 ; P1.A12@3.962,18.25 4.035,18.25 P1.A12@4.048,18.237 ; P1.A12@3.962,18.25 P1.A12 3.663,18.237 P1.A12@3.975,18.237 ; P1.A12@3.962,18.25 P1.A12@3.975,18.237 ; P1.A12@3.975,18.237 P1.A12@4.048,18.237 ; P1.A1@3.981,23.75 4.035,23.75 P1.A1@4.048,23.763 ; P1.A1@3.981,23.75 P1.A1 3.663,23.763 P1.A1@3.994,23.763 ; P1.A1@3.981,23.75 P1.A1@3.994,23.763 ; P1.A1@3.994,23.763 P1.A1@4.048,23.763 ; J2.A1@18.244,8.757 J2.A1@18.362,8.875 ; J1.A12@18.293,18.243 J1.A12@18.416,18.243 ; J1.A1@18.293,23.757 J1.A1@18.416,23.757
  other v1: 19.575,0.95 20.575,0.95 21.575,0.95 22.575,0.95 23.575,0.95 24.575,0.95 25.575,0.95 26.575,0.95 27.575,0.95 16.525,1.075 13.125,3.15 2.775,8.625 16.4,10.05 19.575,11.05 20.575,11.05 21.575,11.05 22.575,11.05 23.575,11.05 24.575,11.05 25.575,11.05 26.575,11.05 27.575,11.05 4.675,11.95 8.65,12.775 24.875,12.825 4.675,14.775 0.5,15.925 1,15.925 1.5,15.925 19.575,15.95 20.575,15.95 21.575,15.95 22.575,15.95 23.575,15.95 24.575,15.95 25.575,15.95 26.575,15.95 27.575,15.95 0.5,16.396 1,16.396 1.5,16.396 15.525,19.155 8.625,19.159 0.5,25.604 1,25.604 1.5,25.604 19.575,26.05 20.575,26.05 21.575,26.05 22.575,26.05 23.575,26.05 24.575,26.05 25.575,26.05 26.575,26.05 27.575,26.05 0.5,26.075 1,26.075 1.5,26.075
  other v2: 9,5.6 10.1,5.6 11.2,5.6 12.3,5.6 13.4,5.6 9,6.7 10.1,6.7 11.2,6.7 12.3,6.7 13.4,6.7 9,7.8 12.3,7.8 13.4,7.8 9,8.9 11.2,8.9 13.4,8.9 10.1,10 11.2,10 12.3,10 13.4,10
LED_B_n: R21.2 U2.27 | length 11.4
  Component Side w0.127: U2.27 14.624,6.026 15.111,6.026 15.188,5.95 v1(15.275,5.95) ; v1(16.4,12.8) 16.487,12.8 16.662,12.625 R21.2
  Signal Layer 2 w0.127: v1(15.275,5.95) 15.325,5.95 15.689,6.314 15.689,6.727 14.6,7.816 14.6,9.85 16.4,11.65 v1(16.4,12.8)
LED_G_n: R20.2 U2.22 | length 15.3
  Component Side w0.127: v1(12.9,3.75) 12.926,3.776 12.926,4.376 U2.22 ; v1(18.3,13.25) 18.339,13.289 18.564,13.289 R20.2
  Signal Layer 2 w0.127: v1(12.9,3.75) 14.75,3.75 16.197,5.197 16.197,7.003 15.129,8.071 15.129,9.629 17.159,11.659 17.159,12.159 17.6,12.6 18.15,12.6 18.3,12.75 v1(18.3,13.25)
LED_R_n: R19.2 U2.26 | length 12.4
  Component Side w0.127: U2.26 14.908,5.55 15.046,5.412 15.213,5.412 v1(15.275,5.35) ; v1(17.725,13.1) 17.787,13.162 17.787,13.412 R19.2
  Signal Layer 2 w0.127: v1(15.275,5.35) 15.943,6.018 15.943,6.832 14.875,7.9 14.875,9.75 16.575,11.45 16.575,11.466 16.9,11.791 16.9,12.725 17.275,13.1 v1(17.725,13.1)
NetC1_2: C1.2 FB1.1 U1.A1 U1.B1 | length 2.6
  Component Side w0.127: C1.2 23.85,12.85 U1.B1 U1.A1
  Component Side w0.254: FB1.1 23.3,12.7 C1.2
NetC5_2: C5.2 C6.2 FB2.1 U2.9 | length 3.3
  Component Side w0.254: FB2.1 4.65,6.723 4.873,6.5 C6.2 C5.2 6.648,6.548 7.798,6.548 U2.9
NetD1_1: D1.1 R21.1 | length 8.2
  Component Side w0.127: R21.1 19.966,12.459 19.966,12.209 20.175,12 26.012,12 26.908,12.896 26.908,13.108 D1.1
NetD1_2: D1.2 R20.1 | length 9.4
  Component Side w0.127: R20.1 20.275,13.525 v1(20.525,13.775) ; v1(26.65,12.05) 26.691,12.091 27.066,12.091 27.63,12.655 D1.2
  Bottom Layer w0.127: v1(20.525,13.775) 24.925,13.775 v1(26.65,12.05)
NetD1_3: D1.3 R19.1 | length 8.4
  Component Side w0.127: R19.1 22.775,14.425 23.191,14.841 26.62,14.841 D1.3
NetDN_1: DN.1 P1.A7 | length 5
  Bottom Layer w0.254: P1.A7 5.875,20.75 5.948,20.677 8.377,20.677 DN.1@8.55,20.85
NetDN_2: DN.2 J1.A7 J1.B7 | length 10.3
  Component Side w0.127: v1(17.619,20.729) 17.619,20.756 18.049,21.185 18.51,21.185 J1.B7
  Bottom Layer w0.254: DN.2@9.55,20.85 9.723,20.677 16.623,20.677 ; 16.625,20.675 16.623,20.677 ; v1(17.619,20.729) 17.608,20.718 17.162,20.718 17.121,20.677 16.623,20.677 ; v1@17.622,20.753 18.572,20.753 J1.A7
NetDP_1: DP.1 P1.A6 | length 2.8
  Bottom Layer w0.254: P1.A6 6.4,21.25 DP.1@6.45,21.2
NetDP_2: DP.2 J1.A6 J1.B6 | length 13.6
  Component Side w0.127: v1@17.063,21.138 v1(17.125,21.2) 17.125,20.6 17.412,20.314 17.791,20.314 18.142,20.664 18.488,20.664 J1.B6
  Bottom Layer w0.254: DP.2 9.934,21.25 9.984,21.2 v1(17.125,21.2) 17.14,21.215 17.729,21.215 17.764,21.25 J1.A6
NetJ1_A2: J1.A2 P1.A2 | length 15.8
  Bottom Layer w0.254: P1.A2 4.7,23.25 5.8,24.35 16.25,24.35 17.35,23.25 J1.A2
NetJ1_A3: J1.A3 P1.A3 | length 15.6
  Bottom Layer w0.254: P1.A3 P1.A3@4.048,22.75 ; P1.A3@4.035,22.763 P1.A3@4.048,22.75 ; J1.A3@18.3,22.773 17.979,22.773 17.902,22.85 17.025,22.85 16,23.875 5.95,23.875 4.825,22.75 P1.A3@4.048,22.75
NetJ1_A4: J1.A4 J1.A9 J1.B4 J1.B9 R24.2 U4.9 | length 20.8
  Component Side w0.127: U4.9 14.525,21.725 14.75,21.95 R24.2
  Component Side w0.254: v1(15.525,23.125) 15.525,22.05 R24.2 R24.2@15.975,22.3 ; v1(16.025,23.125) 16.025,22.35 R24.2@15.975,22.3 ; v1(17.375,19.625) v1(17.875,19.625) 17.928,19.625 18.03,19.727 18.552,19.727 J1.B4 ; J1.B9 17.753,22.25 17.703,22.3 v1(16.625,22.3) R24.2@15.975,22.3
  Signal Layer 2 w0.508: v1(15.525,23.125) v1(16.025,23.125) 16.625,22.525 v1(16.625,22.3) 17.8,22.3 18.325,21.775 18.325,19.975 17.975,19.625 v1(17.875,19.625) v1(17.375,19.625)
  Bottom Layer w0.254: v1(15.525,23.125) v1(16.025,23.125) 16.703,22.447 16.825,22.447 ; v1(16.625,22.3) 16.678,22.3 16.825,22.447 ; v1(17.375,19.625) v1(17.875,19.625) 17.928,19.625 18.03,19.727 18.552,19.727 J1.A9 ; J1.A4 18.552,22.273 17.94,22.273 17.766,22.447 16.825,22.447
NetJ1_A8: J1.A8 P1.A8 | length 15.1
  Bottom Layer w0.254: P1.A8 7.35,20.25 7.6,20 9.919,20 10.187,20.269 16.558,20.269 16.577,20.25 J1.A8
NetJ1_A10: J1.A10 P1.A10 | length 15.9
  Bottom Layer w0.254: P1.A10 4.95,19.25 6.15,18.05 16.2,18.05 17.281,19.131 17.642,19.131 17.657,19.146 18.073,19.146 18.154,19.227 18.552,19.227 J1.A10
NetJ1_A11: J1.A11 P1.A11 | length 15.9
  Bottom Layer w0.254: P1.A11 4.825,18.75 6,17.575 16.4,17.575 17.575,18.75 J1.A11
NetJ1_B2: J1.B2 P1.B2 | length 15.9
  Component Side w0.254: P1.B2 4.8,18.75 5.975,17.575 16.375,17.575 17.55,18.75 J1.B2
NetJ1_B3: J1.B3 P1.B3 | length 15.9
  Component Side w0.254: P1.B3 4.95,19.25 6.15,18.05 16.175,18.05 17.271,19.146 18.073,19.146 18.154,19.227 18.552,19.227 J1.B3
NetJ1_B8: J1.B8 P1.B8 | length 15.2
  Component Side w0.127: v1(17.463,21.694) 17.501,21.732 18.557,21.732 J1.B8
  Component Side w0.254: P1.B8 4.038,21.75 4.048,21.74 4.918,21.74 v1(4.929,21.729)
  Bottom Layer w0.127: v1(4.929,21.729) 5.016,21.729 5.162,21.875 9.775,21.875 10.116,21.534 16.806,21.534 16.985,21.714 17.443,21.714 v1(17.463,21.694)
NetJ1_B10: J1.B10 P1.B10 | length 15.8
  Component Side w0.254: P1.B10 4.035,22.75 4.85,22.75 5.95,23.85 16.05,23.85 17.15,22.75 J1.B10
NetJ1_B11: J1.B11 P1.B11 | length 15.8
  Component Side w0.254: P1.B11 4.725,23.25 5.8,24.325 16.275,24.325 17.35,23.25 17.75,23.25 J1.B11
NetJ2_A5: J2.A5 R22.1 | length 8.6
  Component Side w0.127: R22.1 16.15,2.15 16.15,2.525 16.3,2.675 17.025,2.675 17.19,2.84 17.19,5.459 16.955,5.694 16.955,6.628 17.1,6.772 17.1,7.568 v1(17.084,7.584)
  Bottom Layer w0.127: v1(17.084,7.584) 17.107,7.561 17.107,7.168 17.525,6.75 J2.A5
NetJ2_B5: J2.B5 R23.1 | length 4.3
  Component Side w0.127: R23.1 17.444,2.544 17.444,4.919 17.618,5.093 17.953,5.093 18.023,5.163 18.488,5.163 J2.B5
NetP1_A4: P1.A4 P1.A9 P1.B4 P1.B9 R24.1 U4.8 U4.10 | length 22.9
  Component Side w0.127: U4.10 14.025,21.675 13.75,21.95 R24.1 13.15,21.675 13.15,19.325 13.625,18.85 14.875,18.85 15.025,19 U4.8
  Component Side w0.254: P1.B4 v1(4.3,19.75) ; P1.B9@3.65,22.263 4.044,22.263 4.048,22.259 4.249,22.259 v1(4.258,22.268)
  Component Side w0.508: 7.35,22.675 v1(7.35,23) 7.65,23.3 11.15,23.3 11.882,22.568 12.479,22.568 12.875,22.172 R24.1
  Signal Layer 2 w0.508: v1(4.3,19.75) 4.3,22.226 v1(4.258,22.268) 4.615,22.625 v1(7,22.625) v1(7.7,22.625)
NetP1_A5: P1.A5 R26.1 | length 7
  Bottom Layer w0.127: P1.A5 4.327,21.75 4.752,22.175 10.038,22.175 10.263,21.95 v1(10.35,21.95)
NetP1_B5: P1.B5 R25.1 U5.8 U5.10 | length 11.7
  Component Side w0.127: U5.10 7.125,21.65 6.85,21.925 R25.1 6.175,21.725 6.175,19.575 6.825,18.925 7.975,18.925 8.125,19.075 U5.8
  Component Side w0.254: P1.B5@3.65,20.263 4.563,20.263 5.975,21.675 R25.1
NetQ1_1: Q1.1 Q2.1 R3.2 R4.2 R5.1 R6.1 R7.1 R8.1 U3.C1 | length 40.2
  Component Side w0.127: Q2.1 2.15,3.85 R8.1 ; v1(2.75,4.55) 2.688,4.488 2.688,4.388 R8.1 ; Q1.1 5.35,13.8 v1(5.75,14.2) ; U3.C1 2.5,3.8 R8.1 ; R4.2 12.438,13.738 12.438,13.913 v1(12.5,13.975) 12.525,13.95 15.325,13.95 15.5,13.775 R5.1 R6.1 ; R3.2 R7.1
  Signal Layer 2 w0.127: v1(2.75,4.55) 1.9,5.4 1.9,10.35 3.85,12.3 3.975,12.425 4.4,12.425 4.95,12.975 4.95,13.4 v1(5.75,14.2) 6.5,14.95 9.661,14.95 10.061,14.55 10.525,14.55 11.1,13.975 v1(12.5,13.975)
  Bottom Layer w0.127: v1(15.325,3.55) 14.775,4.1 14.775,11.325 v1(15.5,12.05)
NetQ1_4: Q1.4 Q3.1 R11.2 R12.2 R13.1 R14.1 R15.1 R16.1 U3.C3 | length 34.9
  Component Side w0.127: Q1.4 2.925,12.875 2.7,12.65 2.7,11.3 3.209,10.791 3.584,10.791 v1(3.625,10.75) 3.625,10.663 3.764,10.524 3.764,10.236 R14.1 R13.1 3.662,8.762 3.662,8.612 v1(3.6,8.55) ; U3.C3 3.9,2.475 3.975,2.4 5.925,2.4 ; v1(6.45,3.1) 6.45,2.55 R16.1 ; Q3.1 6.75,2.25 R16.1 ; R15.1 11,1.8 R11.2 10.935,0.534 6.215,0.534 5.925,0.825 5.925,2.4 ; 5.925,2.4 R16.1
  Signal Layer 2 w0.127: v1(3.6,8.55) 3.6,5.125 4.375,4.35 5.625,4.35 6.45,3.525 v1(6.45,3.1) ; v1(3.625,10.75) 4.375,10.75 5.65,12.025 5.65,13.025 6.7,14.075 v1(9.825,14.075)
NetQ2_3: Q2.3 R8.2 | length 1
  Component Side w0.127: R8.2 1.45,3.85 Q2.3
NetQ2_6: Q2.6 R1.2 | length 1.1
  Component Side w0.127: Q2.6 2.15,1.45 R1.2
NetQ3_3: Q3.3 R16.2 | length 1.1
  Component Side w0.127: R16.2 6.75,1.55 Q3.3
NetQ3_6: Q3.6 R9.2 | length 1.1
  Component Side w0.127: Q3.6 9.45,2.25 R9.2
NRST: R28.2 U2.7 | length 1.5
  Component Side w0.127: R28.2@6.55,8.1 6.975,8.1 7.525,7.55 U2.7
OSC_IN: U2.5
OSC_OUT: U2.6
SCL: R17.2 U2.42 U4.5 U5.5 | length 12.9
  Component Side w0.127: U5.5 9.725,15.55 v1(10.262,15.012) ; U2.42 v1(11.45,14.675) ; R17.2 11.45,15.15 v1(11.45,14.675) ; U4.5 16.025,14.55 15.725,14.25 13.55,14.25 13.125,14.675 v1(11.45,14.675)
  Signal Layer 2 w0.127: v1(10.262,15.012) 11.112,15.012 v1(11.45,14.675)
SDA: R18.1 U2.43 U4.4 U5.4 | length 13.6
  Component Side w0.127: U5.4 8.625,14.65 8.75,14.525 10.95,14.525 ; U2.43 10.95,14.525 ; U4.4 15.525,16.375 15.375,16.525 13.575,16.525 13.05,16 11.4,16 R18.1 10.95,15.45 10.95,14.525
TX_CLK: U2.15 U2.46 | length 9.7
  Component Side w0.127: v1(9.4,11.9) 9.426,11.874 9.426,11.224 U2.46 ; v1(9.406,3.706) 9.428,3.728 9.428,4.378 U2.15
  Bottom Layer w0.127: v1(9.4,11.9) 9.4,11.814 9.55,11.664 9.55,3.937 9.406,3.794 v1(9.406,3.706)
UART_RX: U2.31
UART_TX: U2.30
USB_C_CC1: J1.A5 Q1.6 R26.2 | length 21.3
  Component Side w0.127: Q1.6 3.625,13.025 3.863,13.263 3.963,13.263 v1(4.025,13.325)
  Signal Layer 2 w0.127: v1(4.025,13.325) 5.1,14.4 5.1,15.125 6.2,16.225 6.2,16.25 6.391,16.441 9.041,16.441 11.35,18.75 v1(11.35,21.95)
  Bottom Layer w0.127: v1(11.35,21.95) 11.412,21.888 11.582,21.888 11.586,21.885 16.797,21.885 17.042,22.129 17.635,22.129 18.014,21.75 J1.A5
USB_C_CC2: J1.B5 Q1.3 R25.2 U5.9 | length 26.4
  Component Side w0.127: Q1.3 2.925,13.875 2.888,13.912 2.813,13.912 2.65,14.075 2.65,15.25 2.933,15.533 3.183,15.533 v1(3.225,15.575) ; U5.9 7.625,21.7 7.85,21.925 R25.2 ; v1(16.65,19.75) 16.951,20.051 17.889,20.051 18.001,20.164 18.213,20.164 18.242,20.192 J1.B5@18.517,20.192
  Component Side w0.254: R25.2 8.725,21.675 9.248,21.152 9.948,21.152 10.375,20.725 v1(10.375,19.754)
  Signal Layer 2 w0.127: v1(3.225,15.575) 4.45,15.575 5.875,17 8.75,17 10.375,18.625 v1(10.375,19.754)
  Bottom Layer w0.254: v1(10.375,19.754) 10.377,19.752 16.648,19.752 v1(16.65,19.75)
USB_D_N: J2.A7 J2.B7 U2.32 | length 8.4
  Component Side w0.127: U2.32 15.275,8.55 15.55,8.275 v1(15.554,8.275) ; v1(17.781,5.509) 17.693,5.509 17.209,5.993 17.209,6.347 17.453,6.59 17.797,6.59 18.051,6.336 18.488,6.336 J2.B7
  Bottom Layer w0.127: v1(15.554,8.275) 15.55,8.271 15.55,7.662 17.704,5.509 v1(17.781,5.509) 18.022,5.75 J2.A7
USB_D_P: J2.A6 J2.B6 U2.33 | length 6.8
  Component Side w0.127: U2.33 15.55,9.05 16.196,8.404 16.196,8.179 v1(16.25,8.125) ; v1(17.625,6.175) 17.702,6.175 18.041,5.837 18.213,5.837 18.3,5.75 J2.B6
  Bottom Layer w0.127: v1(16.25,8.125) 16.25,7.55 v1(17.625,6.175) 17.662,6.212 18.537,6.212 J2.A6
VBUS: FB1.2 J2.A4 J2.A9 J2.B4 J2.B9 | length 15.1
  Component Side w0.254: v1(17.65,7.275) 17.662,7.263 18.562,7.263 J2.B9 ; v1(17.9,4.678) 17.953,4.678 18.002,4.727 18.552,4.727 J2.B4
  Signal Layer 2 w0.508: v1(17.9,4.678) 18.425,5.203 18.425,6.5 v1(17.65,7.275) 17.65,7.293 17.706,7.349 17.706,7.819 17.2,8.325 17.2,9.8 20.1,12.7 20.451,12.7 v1(20.451,12.95) ; v1(20.452,12.45) 20.452,12.7 v1(21.425,12.7)
  Bottom Layer w0.254: v1(17.65,7.275) 17.675,7.25 J2.A4 ; v1(17.9,4.678) 17.953,4.678 18.002,4.727 18.552,4.727 J2.A9
VBUS_ALERT_n: U2.20 U4.3 | length 12.8
  Component Side w0.127: v1(11.95,3.8) U2.20
  Signal Layer 2 w0.127: v1(11.95,3.8) 12.003,3.8 12.959,4.756 12.959,10.182 15.025,12.248 v1(15.025,14.675)
pads on no net: BOOT.A2 BOOT.B2 J2.A2 J2.A3 J2.A8 J2.A10 J2.A11 J2.B2 J2.B3 J2.B8 J2.B10 J2.B11 P1.B6 P1.B7 U2.2 U2.21 U2.25

## Polygon pours and split planes (outlines as drawn)
GND on Signal Layer 2 "GND_L03_P000" (solid, pour order 0): 0,0 0,0.025 0,27 28.5,27 28.5,0
GND on Signal Layer 1 "GND_L02_P001" (solid, pour order 1): 0,0 0,0.025 0,27 28.5,27 28.5,0

## Silkscreen, mask and mechanical layers (free items; w line width, h text height)
Top Overlay:
  text "EPR Twinkie Rev 1" at 5.375,24.975 h1.27
Bottom Overlay:
  text "@" at 16.375,22.75 h4

## Text inside footprints (layer, text, board x,y; h text height)
P1: Mechanical 1 "Outside of enclosure" at -2.054,6.379 h1.52 r90